# Altium PCB CW308T_D2000_PANEL.PcbDoc
Units mm, origin at the board's own origin, x right, y up, seen from the top; angles counter-clockwise.
Board outline 114.27 x 138.78 mm, 2 copper layers (Top Layer, Bottom Layer); 6 components, 0 nets, 10 pads, 0 vias.
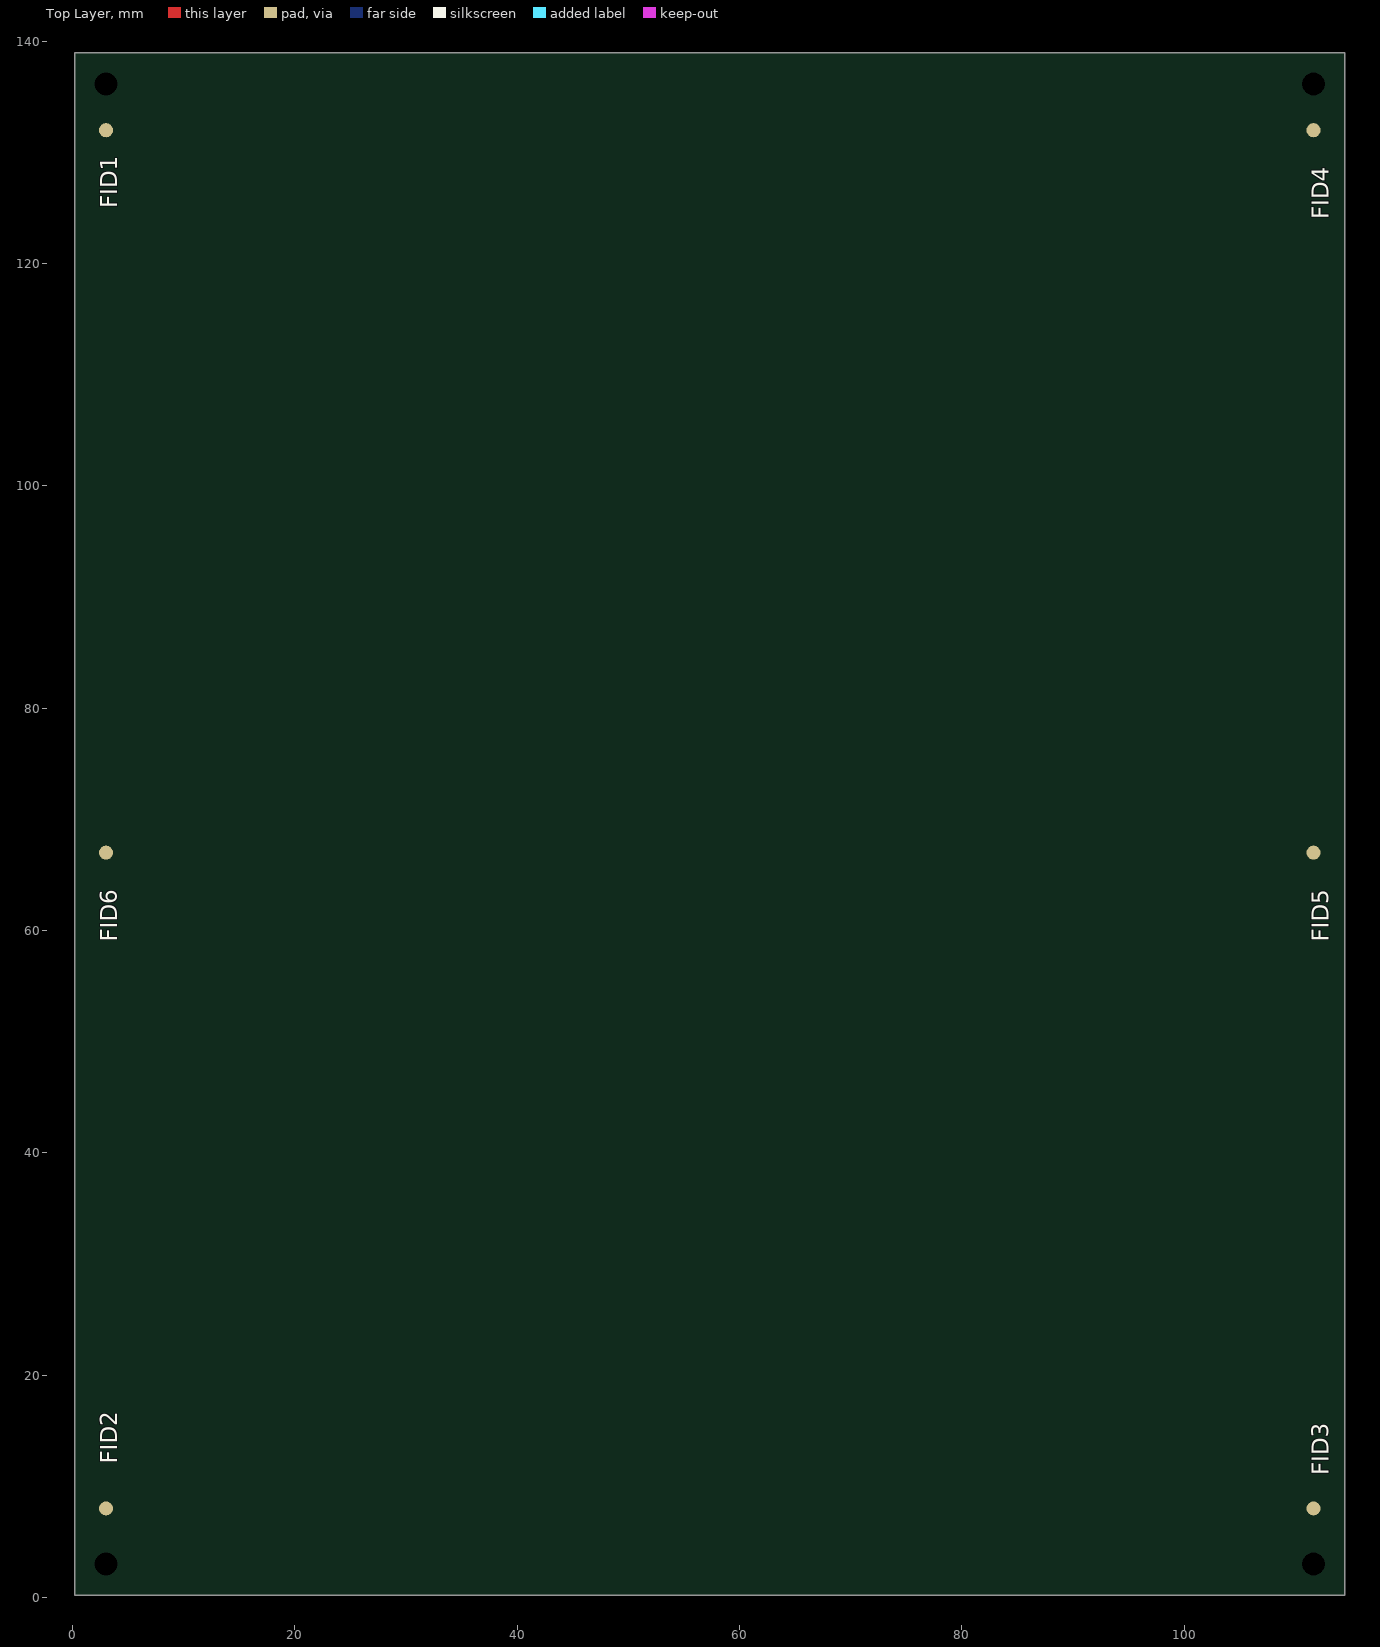
[diagram p0: Top Layer view]
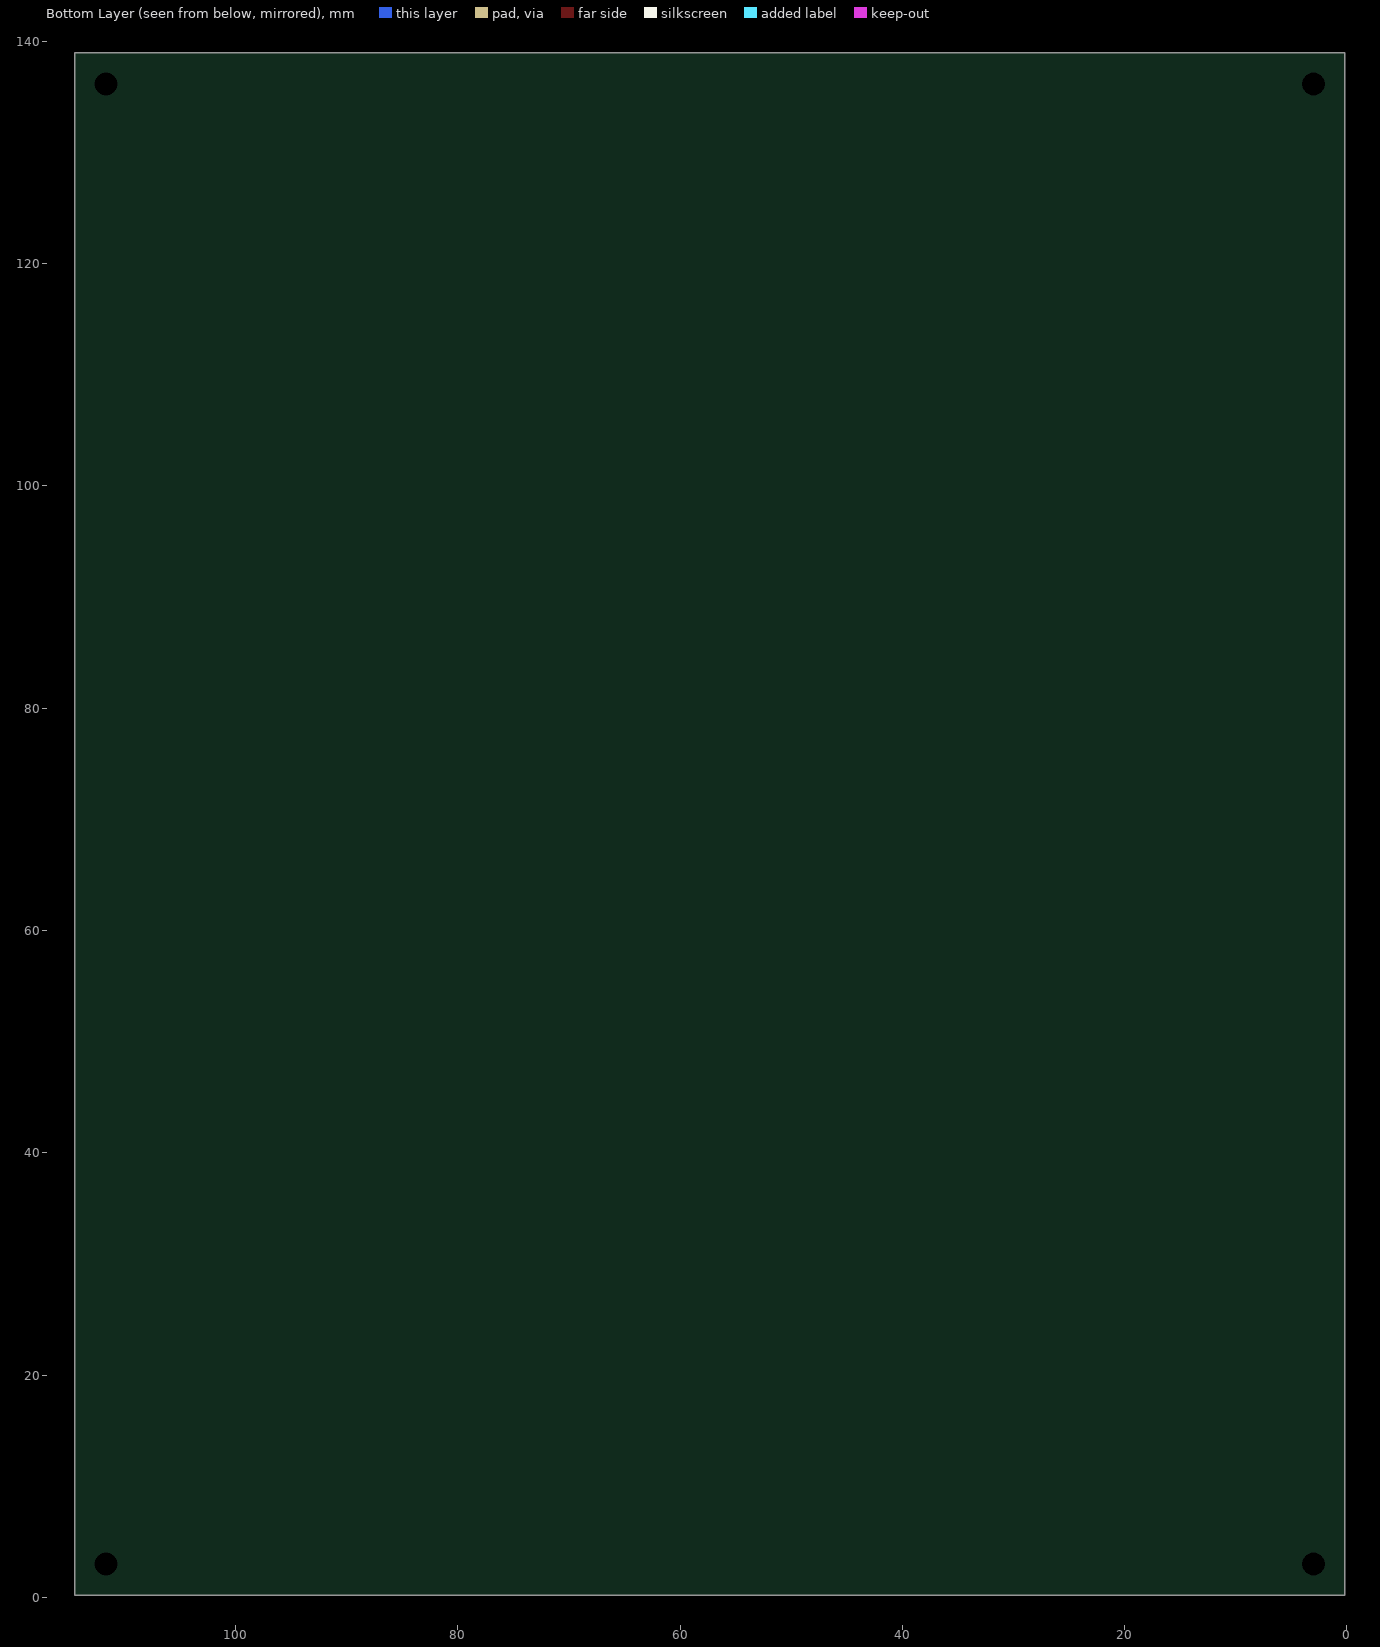
[diagram p1: Bottom Layer view, seen from below]

## Layer stack, top to bottom
Top Solder: solder mask 0.0102, Solder Resist, Dk 3.5
Top Layer: signal copper 0.0356
Dielectric 1: dielectric 0.32, FR-4, Dk 4.8
Bottom Layer: signal copper 0.0356
Bottom Solder: solder mask 0.0102, Solder Resist, Dk 3.5

## Board outline
0.19,0.19 114.458,0.19 114.458,138.969 0.19,138.969

## Design rules (kind name [scope] priority, off if disabled: settings)
Clearance [All] p1: gap=0.254 ignorepadtopadclearanceinfootprint=FALSE except(0: Arc-Hole Track-Hole SMDPad-Hole THPad-Hole Via-Hole Fill-Hole Poly-Hole Region-Hole Text-Hole)
PolygonConnect [All] p1: connectstyle=Relief reliefconductorwidth=0.254 reliefentries=4 polygonreliefangle="90 Angle" airgapwidth=0.254
RoutingVias [All] p1: holewidth=0.711 width=1.27 viastyle="Through Hole" minholewidth=0.711 minwidth=1.27 maxholewidth=0.711 maxwidth=1.27
SolderMaskExpansion [All] p1: expansion=0.102
Width [All] p1: maxlimit=0.254 minlimit=0.254 preferedwidth=0.254
30 further rules are at their usual default settings.

## Components (designator, comment, footprint, x,y, rotation, side; value= is the part's Value field where it differs from the comment)
FID1 "Comment" FIDU-ROUND-1.0mm#1 3,132 r0 top
FID2 "Comment" FIDU-ROUND-1.0mm#1 3,8 r0 top
FID3 "Comment" FIDU-ROUND-1.0mm#2 112,8 r0 top
FID4 "Comment" FIDU-ROUND-1.0mm#2 112,132 r0 top
FID5 "Comment" FIDU-ROUND-1.0mm#2 112,67 r0 top
FID6 "Comment" FIDU-ROUND-1.0mm#1 3,67 r0 top

## Footprints (in the part's own frame and the unit in brackets; to place one, negate y for a bottom-side part, rotate by r counter-clockwise, add the part's x,y. Pads: shape width x height; smd on the part's side, far side on the other; paste and mask are expansions set on the pad)
FIDU-ROUND-1.0mm#1 [mm]
  round 1.27 smd paste-2 mask+0.7: M1(0,0)
FIDU-ROUND-1.0mm#2 [mm]
  round 1.27 smd paste-2 mask+0.7: M1(-0.352,0)

## Part data
FID1 FID2 FID3 FID4 FID5 FID6: library part FIDU-ROUND-1.0MM

## Free pads (board coordinates)
  round 0 hole 2.05: B_MH5(3,136.159) B_MH7(3,3) B_MH7(111.648,3) B_MH7(111.648,136.159)

## Nets (pads, with @x,y where several pads share a name; then routed paths per layer and width w, separated by ;. In a path a pad name is that pad's centre, name@x,y a point inside that pad or via, vN(x,y) a via of type N, cw(c..) or ccw(c..) an arc to the next point about the centre after c; other vN are vias at no path point)
pads on no net: FID1.M1 FID2.M1 FID3.M1 FID4.M1 FID5.M1 FID6.M1

## Silkscreen, mask and mechanical layers (free items; w line width, h text height)
VSCORE:
  lines w0.3: 0.19,5 114.458,5 ; 0.19,69.643 114.458,69.643 ; 0.19,134.159 114.458,134.159 ; 5,0.19 5,138.969 ; 57.324,0.19 57.324,138.969 ; 109.648,0.19 109.648,138.969
Panel Outer Layer:
  the board outline again, w0.3

## Panel: embedded boards
"CW308T_D2000.PcbDoc" at 5,5, 2 rows x 2 columns, spacing 64.516 x 52.324, rotation 0